# Altium PCB dc_p3_t11_PCB.PcbDoc (part 1 of 2)
Units mm, origin at the board's own origin, x right, y up, seen from the top; angles counter-clockwise.
Board outline 99.95 x 100 mm, 2 copper layers (Top Layer, Bottom Layer), stack 1.56 mm thick; 142 components, 91 nets, 397 pads, 74 vias.
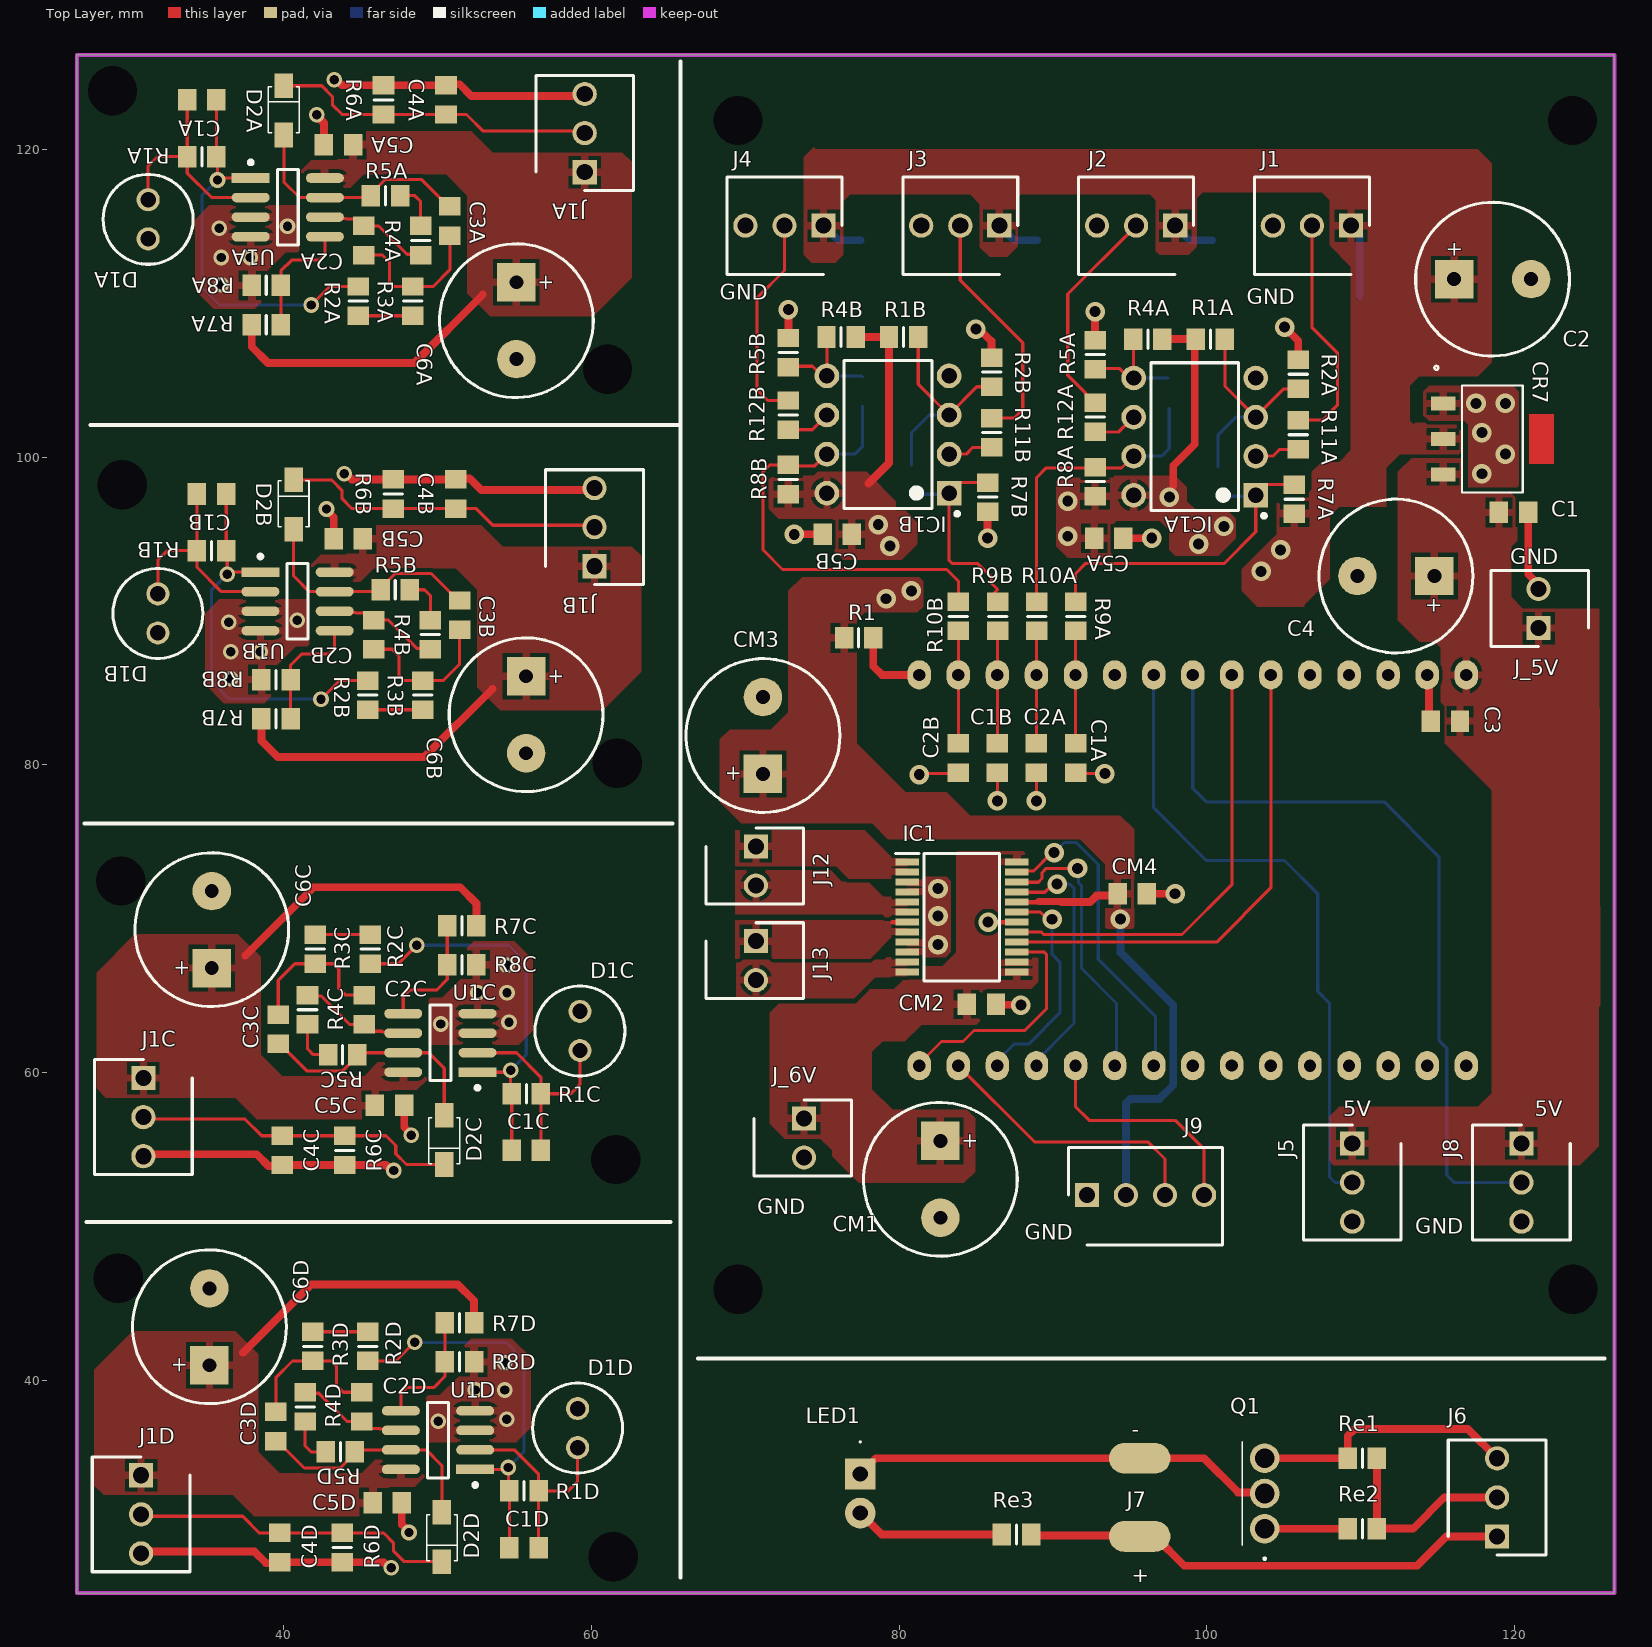
[diagram p0: Top Layer view]
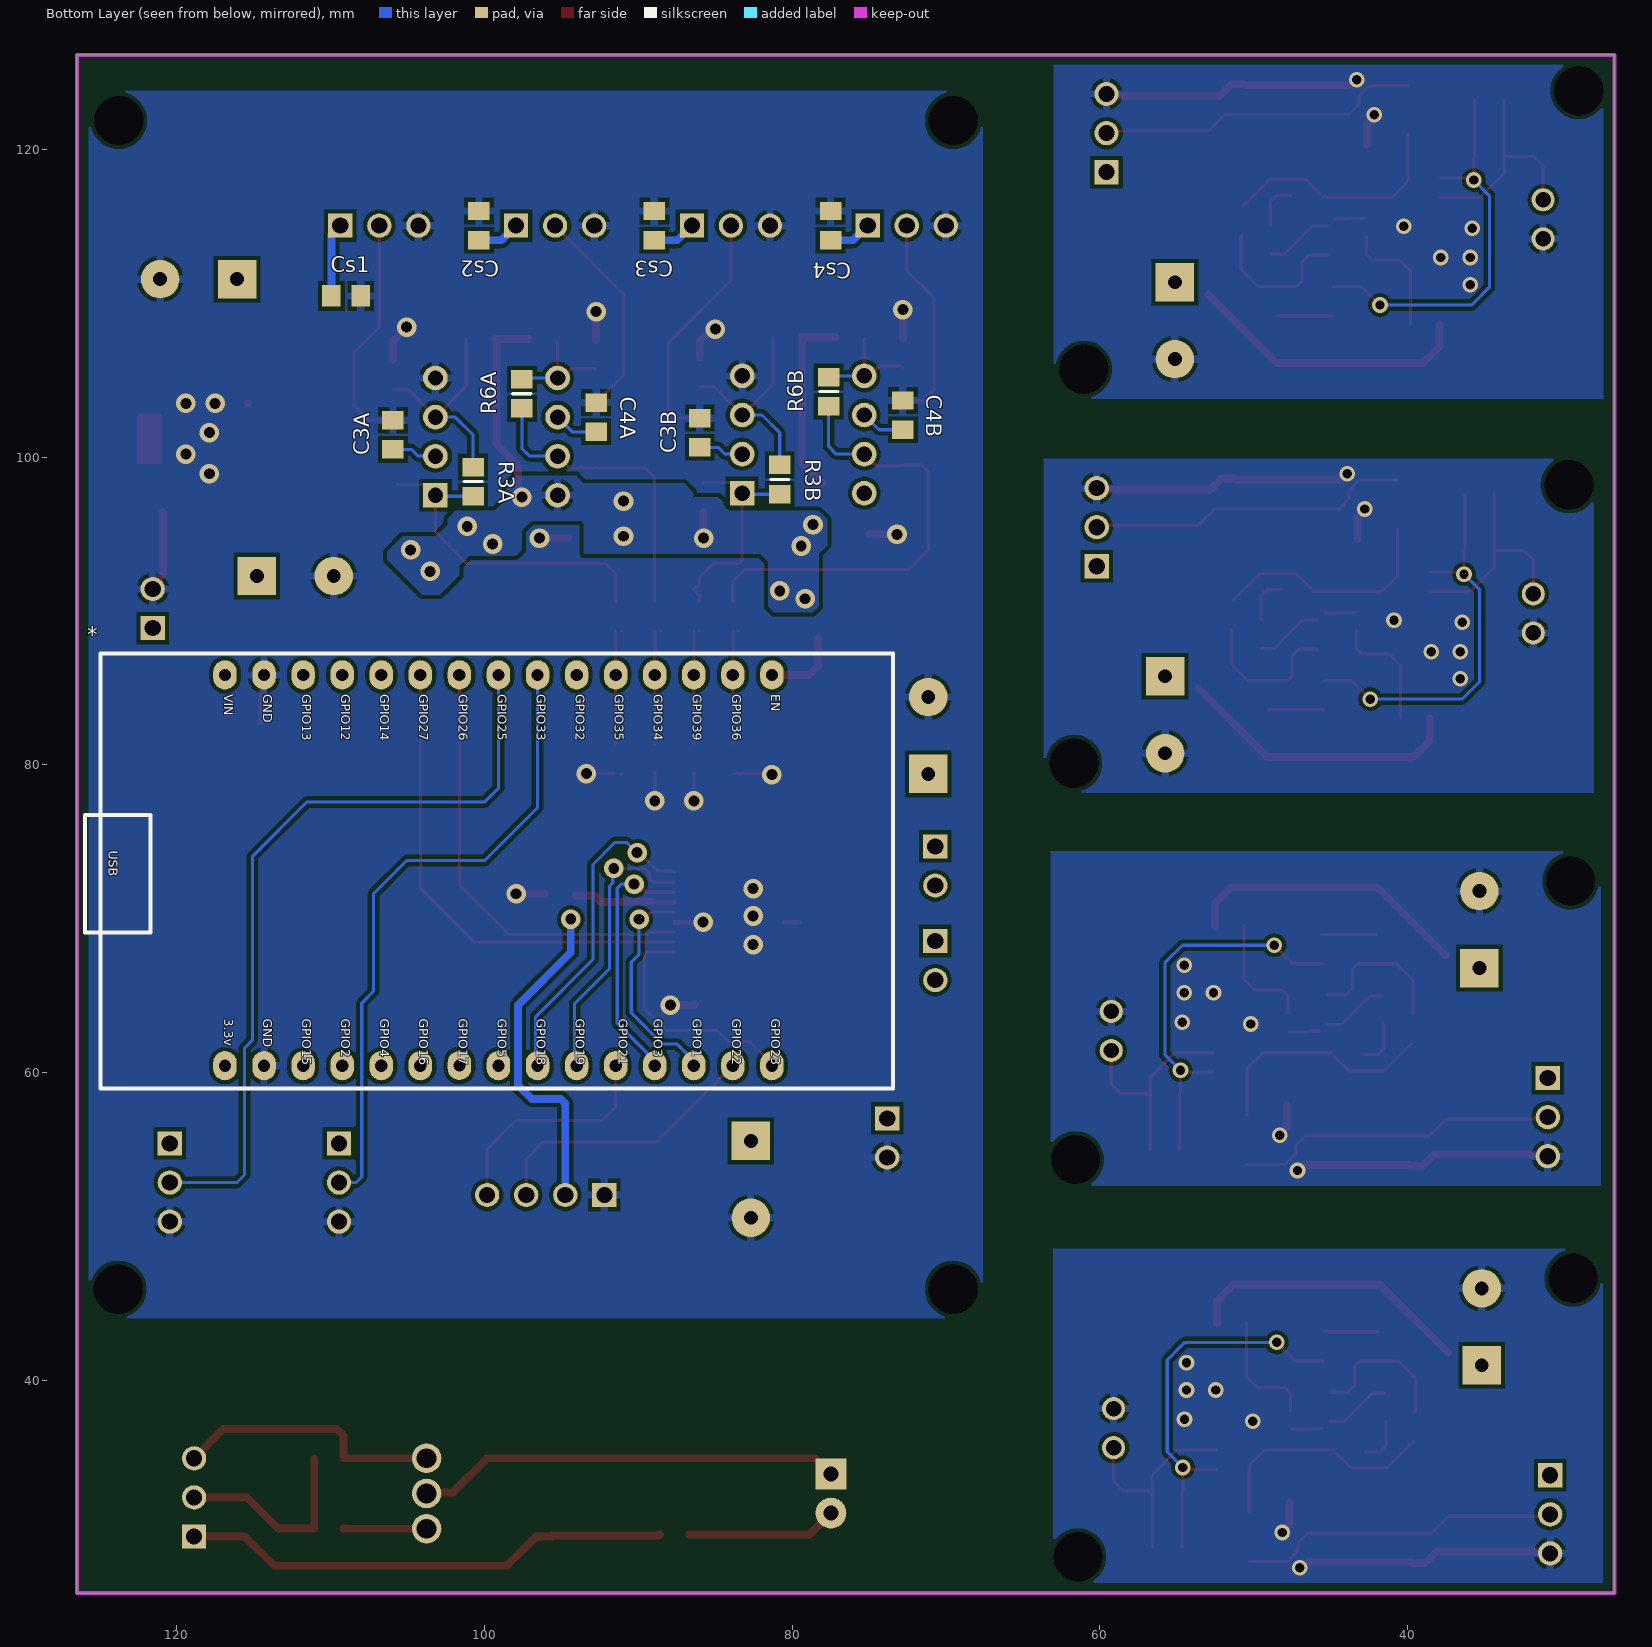
[diagram p1: Bottom Layer view, seen from below]
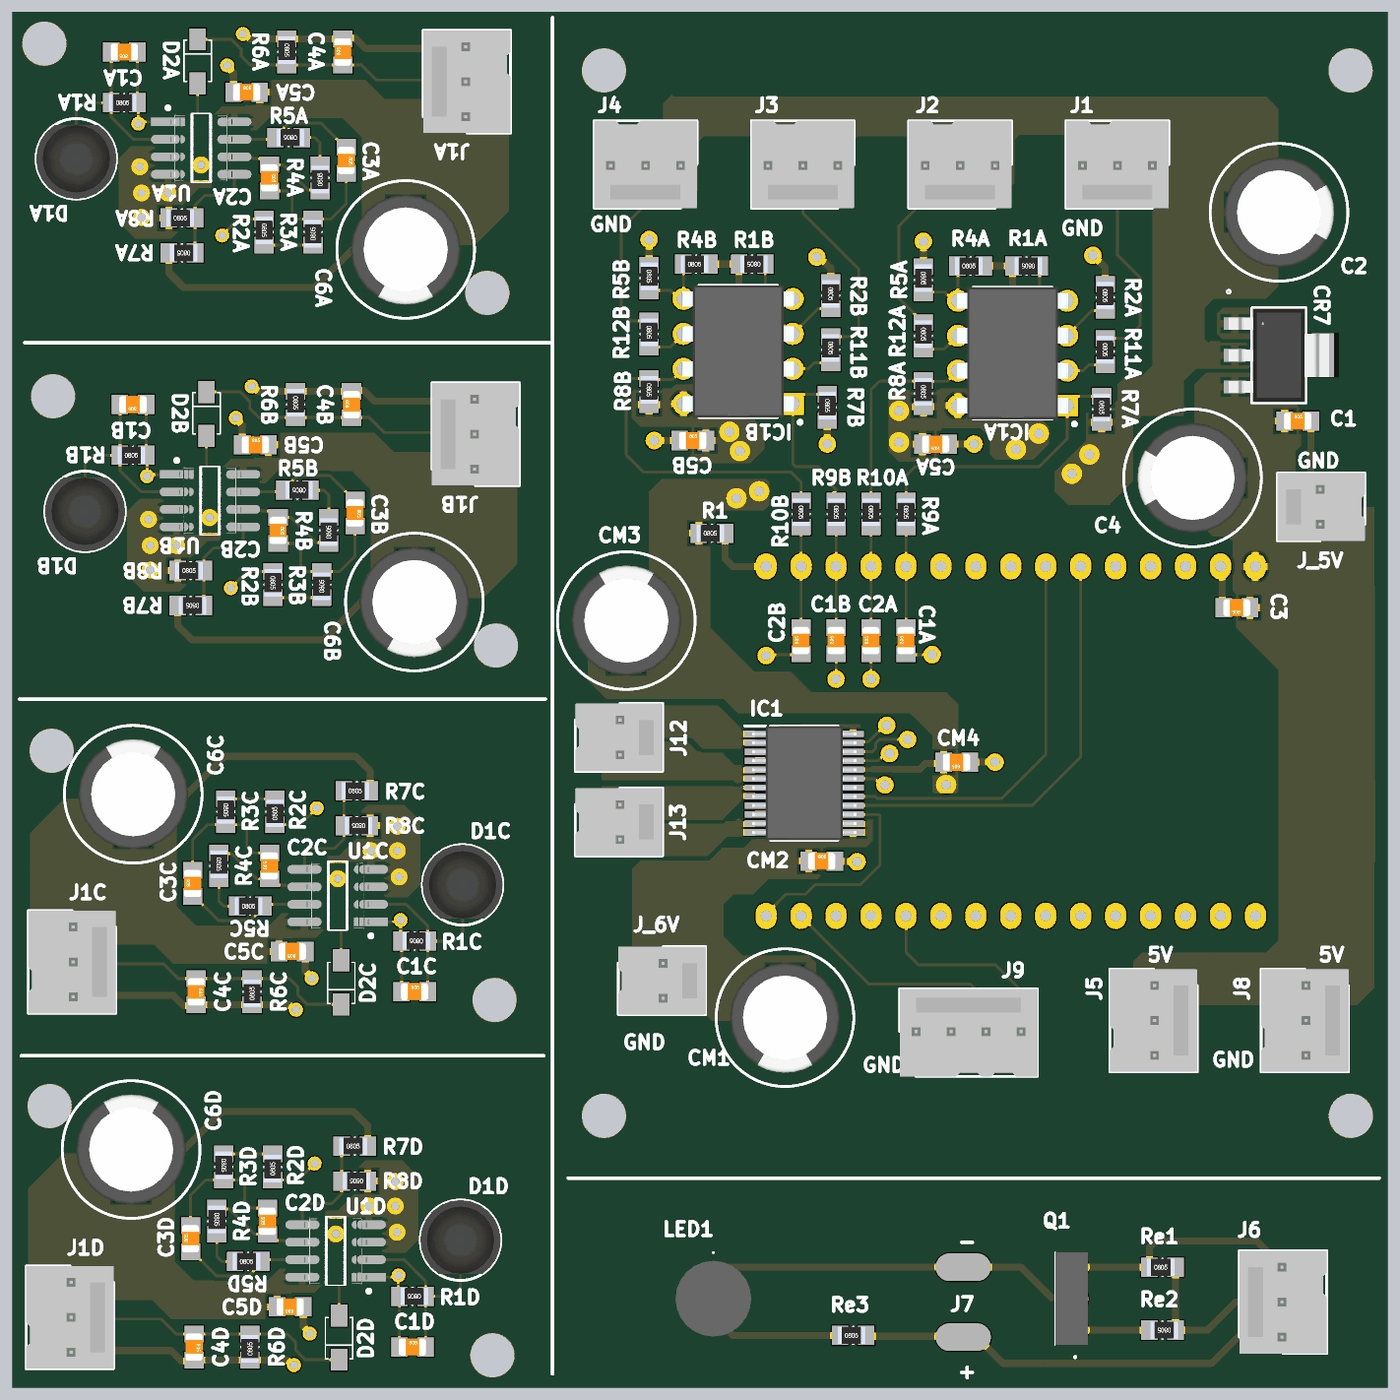
[diagram p3: 3D render of the assembled board from above, using the file's embedded part models]
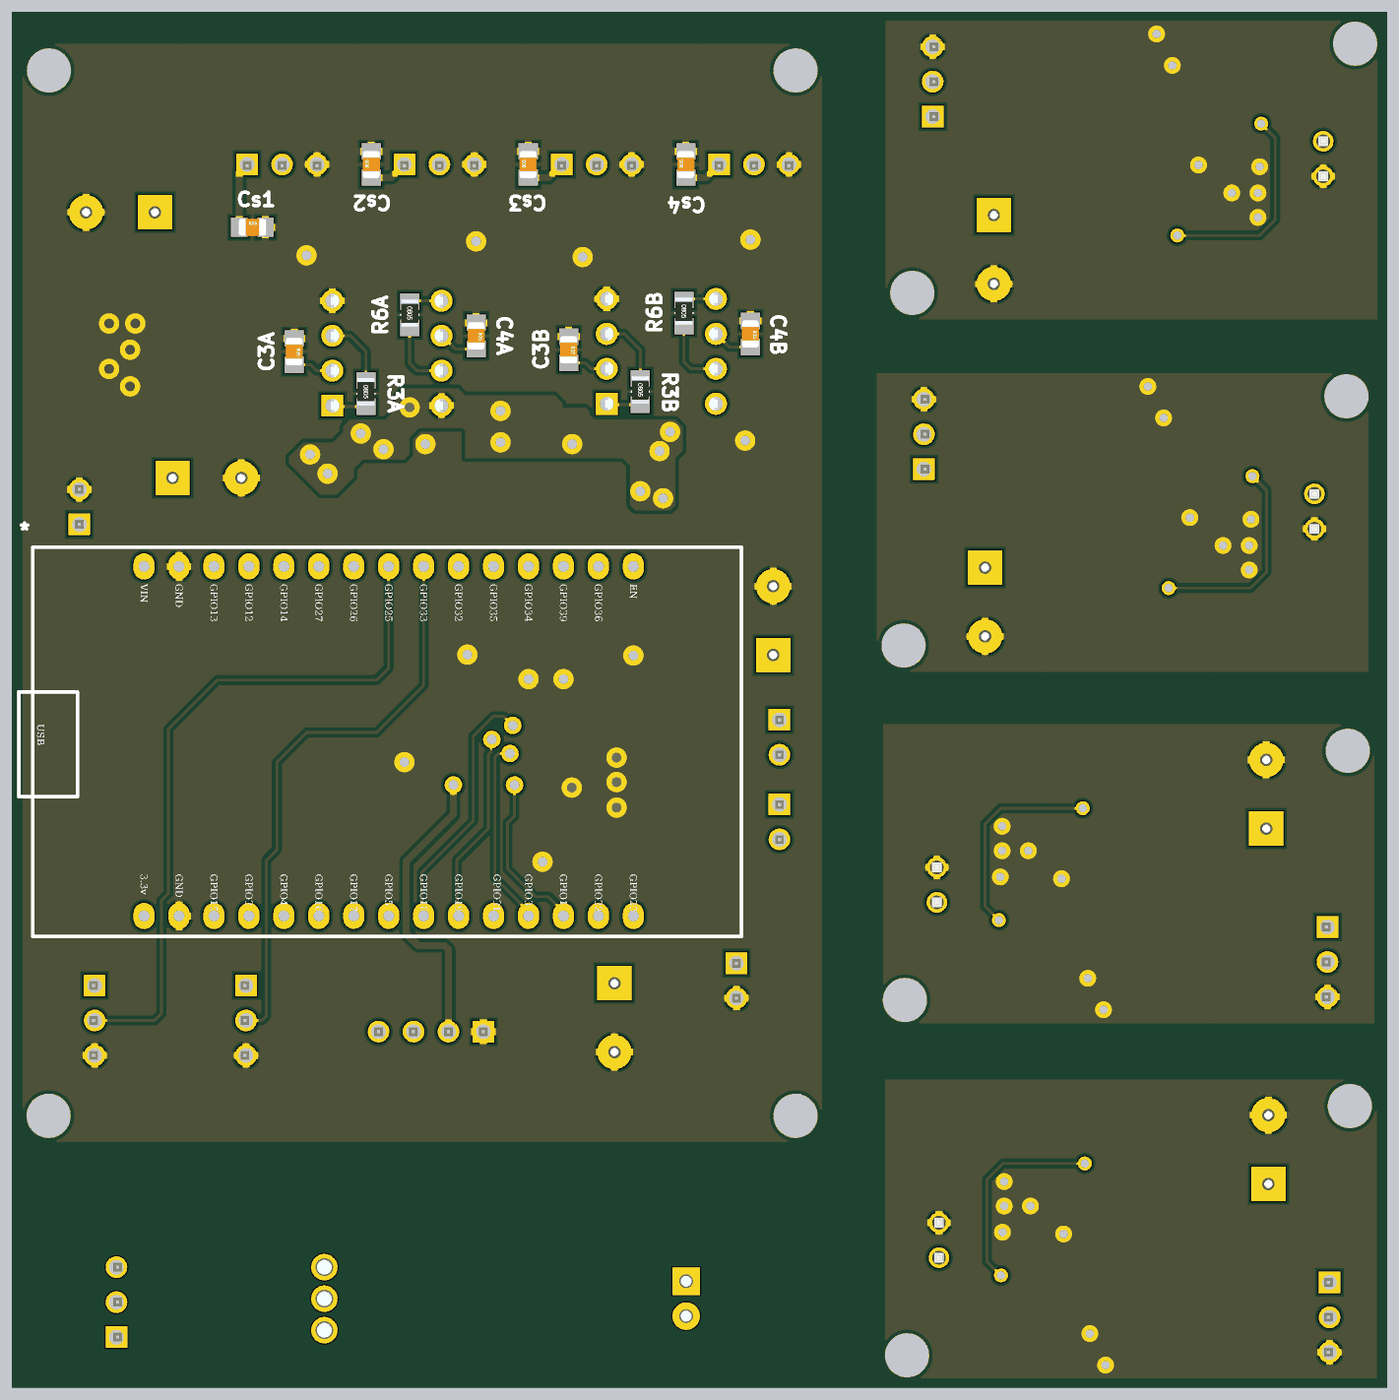
[diagram p4: 3D render of the assembled board from below, using the file's embedded part models]

## Layer stack, top to bottom
Top Solder: solder mask 0.0254, SM-001, Dk 4
Top Layer: signal copper 0.035
Dielectric 1: core 1.4902, Core-039, Dk 4.8
Bottom Layer: signal copper 0.035
Bottom Solder: solder mask 0.0254, SM-001, Dk 4

## Board outline
26.543,26.162 26.543,126.162 126.492,126.162 126.492,26.162

## Design rules (kind name [scope] priority, off if disabled: settings)
BoardOutlineClearance [All] p1: gap=0.3 ignorepadtopadclearanceinfootprint=FALSE except(0.4: Arc-SplitBarrior Arc-SplitContinuation Track-SplitBarrior Track-SplitContinuation SMDPad-SplitBarrior SMDPad-SplitContinuation THPad-SplitBarrior THPad-SplitContinuation Via-SplitBarrior Via-SplitContinuation Fill-SplitBarrior Fill-SplitContinuation Poly-SplitBarrior Poly-SplitContinuation Region-SplitBarrior Region-SplitContinuation Text-SplitBarrior Text-SplitContinuation)
Clearance [All] p1: gap=0.254 ignorepadtopadclearanceinfootprint=TRUE
Height [All] p1: minheight=0 maxheight=50 prefheight=12.7
HoleSize [All] p1: absolutevalues=TRUE maxlimit=12 minlimit=0.25 maxpercent=80.000 minpercent=20.000
MinimumAnnularRing Mounting_holes [HasPad('Free-3_Us4')] p1: minimumring=0
MinimumAnnularRing [All] p2: minimumring=0.13
MinimumSolderMaskSliver [All] p1: minsoldermaskwidth=0.102
PolygonConnect [All] p1: thpad.connectstyle=Relief thpad.reliefconductorwidth=0.508 thpad.reliefentries=4 thpad.polygonreliefangle="90 Angle" thpad.airgapwidth=0.254 smdpad.connectstyle=Relief smdpad.reliefconductorwidth=0.508 smdpad.reliefentries=4 smdpad.polygonreliefangle="90 Angle" smdpad.airgapwidth=0.254 via.connectstyle=Direct via.reliefconductorwidth=0.508 via.reliefentries=4 via.polygonreliefangle="90 Angle" via.airgapwidth=0.254
RoutingVias [InNetClass('Signal')] p1: holewidth=1.016 width=0.61 viastyle="Through Hole" minholewidth=0.25 minwidth=0.4 maxholewidth=1 maxwidth=2
SilkToSilkClearance [All] p1: silktosilkclearance=0.102
SilkToSolderMaskClearance [IsPad] p1: minsilkscreentomaskgap=0.102 clearancetoexposedcopper=TRUE
SolderMaskExpansion [All] p1: expansion=0.102 istentingtop=FALSE
SupplyNets "Schematic Supply Nets_63" [InNet('3V3')] p1: voltage=0.000
SupplyNets "Schematic Supply Nets_62" [InNet('GND')] p2: voltage=0.000
SupplyNets "Schematic Supply Nets_61" [InNet('Vcomp4')] p3: voltage=0.000
SupplyNets "Schematic Supply Nets_60" [InNet('Venv2')] p4: voltage=0.000
SupplyNets "Schematic Supply Nets_59" [InNet('Venv3')] p5: voltage=0.000
SupplyNets "Schematic Supply Nets_58" [InNet('Vcomp1')] p6: voltage=0.000
SupplyNets "Schematic Supply Nets_57" [InNet('Venv4')] p7: voltage=0.000
SupplyNets "Schematic Supply Nets_56" [InNet('Vcomp2')] p8: voltage=0.000
SupplyNets "Schematic Supply Nets_14" [InNet('Vcomp3')] p9: voltage=0.000
SupplyNets "Schematic Supply Nets_13" [InNet('Venv1')] p10: voltage=0.000
SupplyNets "Schematic Supply Nets_85" [InNet('VenvA')] p11: voltage=0.000
SupplyNets "Schematic Supply Nets_82" [InNet('1.65VD')] p12: voltage=0.000
SupplyNets "Schematic Supply Nets_71" [InNet('3V3D')] p13: voltage=0.000
SupplyNets "Schematic Supply Nets_70" [InNet('V2+B')] p14: voltage=0.000
SupplyNets "Schematic Supply Nets_68" [InNet('VmfbA')] p15: voltage=0.000
SupplyNets "Schematic Supply Nets_55" [InNet('GNDA')] p16: voltage=0.000
SupplyNets "Schematic Supply Nets_52" [InNet('1.65VA')] p17: voltage=0.000
SupplyNets "Schematic Supply Nets_50" [InNet('GNDD')] p18: voltage=0.000
SupplyNets "Schematic Supply Nets_48" [InNet('V1+B')] p19: voltage=0.000
SupplyNets "Schematic Supply Nets_46" [InNet('3V3C')] p20: voltage=0.000
SupplyNets "Schematic Supply Nets_45" [InNet('VenvD')] p21: voltage=0.000
SupplyNets "Schematic Supply Nets_44" [InNet('1.65VC')] p22: voltage=0.000
SupplyNets "Schematic Supply Nets_43" [InNet('VmfbD')] p23: voltage=0.000
SupplyNets "Schematic Supply Nets_42" [InNet('1.65VB')] p24: voltage=0.000
SupplyNets "Schematic Supply Nets_41" [InNet('GNDB')] p25: voltage=0.000
SupplyNets "Schematic Supply Nets_39" [InNet('V1+A')] p26: voltage=0.000
SupplyNets "Schematic Supply Nets_38" [InNet('VtiaA')] p27: voltage=0.000
SupplyNets "Schematic Supply Nets_37" [InNet('3V3A')] p28: voltage=0.000
SupplyNets "Schematic Supply Nets_35" [InNet('V2+A')] p29: voltage=0.000
SupplyNets "Schematic Supply Nets_32" [InNet('GNDC')] p30: voltage=0.000
SupplyNets "Schematic Supply Nets_31" [InNet('VtiaD')] p31: voltage=0.000
SupplyNets "Schematic Supply Nets_30" [InNet('VtiaC')] p32: voltage=0.000
SupplyNets "Schematic Supply Nets_27" [InNet('VtiaB')] p33: voltage=0.000
SupplyNets "Schematic Supply Nets_26" [InNet('VmfbB')] p34: voltage=0.000
SupplyNets "Schematic Supply Nets_12" [InNet('VenvB')] p35: voltage=0.000
SupplyNets "Schematic Supply Nets_11" [InNet('3V3B')] p36: voltage=0.000
SupplyNets "Schematic Supply Nets_5" [InNet('VenvC')] p37: voltage=0.000
SupplyNets "Schematic Supply Nets_3" [InNet('VmfbC')] p38: voltage=0.000
SupplyNets "Schematic Supply Nets_47" [InNet('Dspkr')] p39: voltage=0.000
SupplyNets "Schematic Supply Nets_29" [InNet('Dled')] p40: voltage=0.000
SupplyNets "Schematic Supply Nets_22" [InNet('SCL')] p41: voltage=0.000
SupplyNets "Schematic Supply Nets_15" [InNet('Dservo')] p42: voltage=0.000
SupplyNets "Schematic Supply Nets_2" [InNet('SDA')] p43: voltage=0.000
SupplyNets "Schematic Supply Nets_1" [InNet('Dled_e')] p44: voltage=0.000
SupplyNets "Schematic Supply Nets_24" [InNet('MB+')] p45: voltage=0.000
SupplyNets "Schematic Supply Nets_23" [InNet('AIN2')] p46: voltage=0.000
SupplyNets "Schematic Supply Nets_21" [InNet('MA-')] p47: voltage=0.000
SupplyNets "Schematic Supply Nets_20" [InNet('BIN2')] p48: voltage=0.000
SupplyNets "Schematic Supply Nets_19" [InNet('AIN1')] p49: voltage=0.000
SupplyNets "Schematic Supply Nets_18" [InNet('PWMA')] p50: voltage=0.000
SupplyNets "Schematic Supply Nets_17" [InNet('MA+')] p51: voltage=0.000
SupplyNets "Schematic Supply Nets_16" [InNet('STBY')] p52: voltage=0.000
SupplyNets "Schematic Supply Nets_10" [InNet('BIN1')] p53: voltage=0.000
SupplyNets "Schematic Supply Nets_7" [InNet('6V')] p54: voltage=0.000
SupplyNets "Schematic Supply Nets_6" [InNet('MB-')] p55: voltage=0.000
SupplyNets "Schematic Supply Nets_4" [InNet('PWMB')] p56: voltage=0.000
SupplyNets "Schematic Supply Nets_9" [InNet('5V_e')] p57: voltage=0.000
SupplyNets "Schematic Supply Nets_8" [InNet('5V')] p58: voltage=0.000
SupplyNets "Schematic Supply Nets" [InNet('GND_e')] p59: voltage=0.000
Width Width_Motor [InNetClass('Motor_Power')] p1: maxlimit=2 minlimit=0.2 preferedwidth=0.5 minimp=50.000000 maximp=50.000000 favimp=50.000000
Width Width_Signals [InNetClass('Signals')] p2: maxlimit=0.254 minlimit=0.178 preferedwidth=0.203 minimp=50.000000 maximp=50.000000 favimp=50.000000
Width [All] p3: maxlimit=10.16 minlimit=0.127 preferedwidth=0.508
25 further rules are at their usual default settings.

## Classes and differential pairs
net class Signals: 1.65VA 1.65VB 1.65VC 1.65VD AIN1 AIN2 BIN1 BIN2 Dled Dservo Dspkr NetC1A_2 NetC1B_2 NetC1C_2 NetC1D_2 NetC2A_1 NetC2A_2 NetC2B_1 NetC2B_2 NetC2C_1 NetC2C_2 NetC2D_1 NetC2D_2 NetR4A_2 NetR4B_2 NetR4C_2 NetR4D_2 PWMA PWMB SCL SDA STBY Vcomp1 Vcomp2 Vcomp3 Vcomp4 Venv1 VenvA VenvB VenvC VenvD VmfbA VmfbB VmfbC VmfbD Vout1A Vout1B Vout2A Vout2B VtiaA VtiaB VtiaC VtiaD
net class Motor_Power: 6V MA+
channel class sensor: Us1 Us2 Us3 Us4
channel class comparator: Uc1 Uc2
component class Us4: C1D C2D C3D C4D C5D C6D D1D D2D J1D m R1D R2D R3D R4D R5D R6D R7D R8D U1D
component class Us3: C1C C2C C3C C4C C5C C6C D1C D2C J1C R1C R2C R3C R4C R5C R6C R7C R8C U1C
component class Us2: C1B C2B C3B C4B C5B C6B D1B D2B J1B R1B R2B R3B R4B R5B R6B R7B R8B U1B
component class Us1: C1A C2A C3A C4A C5A C6A D1A D2A J1A R1A R2A R3A R4A R5A R6A R7A R8A U1A
component class Uc2: C1B C2B C3B C4B C5B IC1B R1B R2B R3B R4B R5B R6B R7B R8B R9B R10B R11B R12B
component class Uc1: C1A C2A C3A C4A C5A IC1A R1A R2A R3A R4A R5A R6A R7A R8A R9A R10A R11A R12A
component class dc_p3_t11_Sch: * C1 C2 C3 C4 CM1 CM2 CM3 CM4 CR7 Cs1 Cs2 Cs3 Cs4 IC1 J1 J2 J3 J4 J5 J6 J7 J8 J9 J12 J13 J_5V J_6V LED1 Q1 R1 Re1 Re2 Re3

## Components (designator, comment, footprint, x,y, rotation, side; value= is the part's Value field where it differs from the comment)
* "ESP32_30Pin" ESP32_30pin 99.846,73.924 r270 bottom
C1 "CCAP_0805" C0805 119.939,96.418 r0 top value=0.1u
C1A "CCAP_0805" C0805 91.465,80.457 r90 top value=10n (schematic designator C1)
C1A "CCAP_0805" C0805 34.664,123.237 r180 top value=2.2p (schematic designator C1)
C1B "CCAP_0805" C0805 86.385,80.457 r90 top value=10n (schematic designator C1)
C1B "CCAP_0805" C0805 35.299,97.616 r180 top value=2.2p (schematic designator C1)
C1C "CCAP_0805" C0805 55.76,54.944 r0 top value=2.2p (schematic designator C1)
C1D "CCAP_0805" C0805 55.607,29.124 r0 top value=2.2p (schematic designator C1)
C2 "ECAP_CR05P0" EC_CR05 118.578,111.582 r0 top value=10u
C2A "CCAP_0805" C0805 88.925,80.457 r90 top value=10n (schematic designator C2)
C2A "CCAP_0805" C0805 45.205,114.093 r270 top value=1n (schematic designator C2)
C2B "CCAP_0805" C0805 83.845,80.457 r90 top value=10n (schematic designator C2)
C2B "CCAP_0805" C0805 45.84,88.472 r270 top value=1n (schematic designator C2)
C2C "CCAP_0805" C0805 45.219,64.088 r90 top value=1n (schematic designator C2)
C2D "CCAP_0805" C0805 45.066,38.268 r90 top value=1n (schematic designator C2)
C3 "CCAP_0805" C0805 115.508,82.854 r180 top value=0.1u
C3A "CCAP_0805" C0805 105.943,101.465 r270 bottom value=100n (schematic designator C3)
C3A "CCAP_0805" C0805 50.793,115.363 r270 top value=1n (schematic designator C3)
C3B "CCAP_0805" C0805 86.004,101.6 r270 bottom value=100n (schematic designator C3)
C3B "CCAP_0805" C0805 51.428,89.742 r270 top value=1n (schematic designator C3)
C3C "CCAP_0805" C0805 39.631,62.818 r90 top value=1n (schematic designator C3)
C3D "CCAP_0805" C0805 39.478,36.998 r90 top value=1n (schematic designator C3)
C4 "ECAP_CR05P0" EC_CR05 112.293,92.283 r180 top value=10u
C4A "CCAP_0805" C0805 92.735,102.608 r270 bottom value=100n (schematic designator C4)
C4A "CCAP_0805" C0805 50.539,123.237 r90 top value=100n (schematic designator C4)
C4B "CCAP_0805" C0805 72.796,102.743 r270 bottom value=100n (schematic designator C4)
C4B "CCAP_0805" C0805 51.174,97.616 r90 top value=100n (schematic designator C4)
C4C "CCAP_0805" C0805 39.885,54.944 r270 top value=100n (schematic designator C4)
C4D "CCAP_0805" C0805 39.732,29.124 r270 top value=100n (schematic designator C4)
C5A "CCAP_0805" C0805 93.624,94.742 r180 top value=0.1u (schematic designator C5)
C5A "CCAP_0805" C0805 43.554,120.316 r0 top value=0.1u (schematic designator C5)
C5B "CCAP_0805" C0805 44.189,94.695 r0 top value=0.1u (schematic designator C5)
C5B "CCAP_0805" C0805 75.971,94.996 r0 top value=0.1u (schematic designator C5)
C5C "CCAP_0805" C0805 46.87,57.865 r180 top value=0.1u (schematic designator C5)
C5D "CCAP_0805" C0805 46.717,32.045 r180 top value=0.1u (schematic designator C5)
C6A "ECAP_CR05P0" EC_CR05 55.111,108.886 r270 top value=10u (schematic designator C6)
C6B "ECAP_CR05P0" EC_CR05 55.746,83.265 r270 top value=10u (schematic designator C6)
C6C "ECAP_CR05P0" EC_CR05 35.313,69.295 r90 top value=10u (schematic designator C6)
C6D "ECAP_CR05P0" EC_CR05 35.16,43.475 r90 top value=10u (schematic designator C6)
CM1 "ECAP_CR05P0" EC_CR05 82.677,53.061 r270 top value=10u
CM2 "CCAP_0805" C0805 85.344,64.44 r0 top value=0.1u
CM3 "ECAP_CR05P0" EC_CR05 71.145,81.915 r90 top value=10u
CM4 "CCAP_0805" C0805 95.148,71.628 r180 top value=0.1u
CR7 "LD1117S33CTR" SOT-223_STM 118.567,101.194 r270 top
Cs1 "CCAP_0805" C0805 108.991,110.49 r180 bottom value=0.1u
Cs2 "CCAP_0805" C0805 100.355,115.062 r90 bottom value=0.1u
Cs3 "CCAP_0805" C0805 88.951,115.062 r90 bottom value=0.1u
Cs4 "CCAP_0805" C0805 77.495,115.062 r90 bottom value=0.1u
D1A "SFH_203_FA" SFH203FA 31.176,116.743 r270 top (schematic designator D1)
D1B "SFH_203_FA" SFH203FA 31.811,91.123 r270 top (schematic designator D1)
D1C "SFH_203_FA" SFH203FA 59.248,61.438 r90 top (schematic designator D1)
D1D "SFH_203_FA" SFH203FA 59.096,35.618 r90 top (schematic designator D1)
D2A "1N4148W-7-F" SOD123 39.998,122.602 r90 top value=2pF (schematic designator D2)
D2B "1N4148W-7-F" SOD123 40.633,96.981 r90 top value=2pF (schematic designator D2)
D2C "1N4148W-7-F" SOD123 50.426,55.579 r270 top value=2pF (schematic designator D2)
D2D "1N4148W-7-F" SOD123 50.273,29.759 r270 top value=2pF (schematic designator D2)
IC1 "TB6612FNG" SOP65P760X160-24N 84.074,70.104 r0 top
IC1A "LM393NG" DIP794W56P254L959H533Q8B 99.212,101.346 r180 top (schematic designator IC1)
IC1B "LM393NG" DIP794W56P254L959H533Q8B 79.273,101.481 r180 top (schematic designator IC1)
J1 "0022232031" HDRV3W87P0X254_1X3_747X635X1105P 109.372,115.062 r180 top
J1A "0022232031" HDRV3W87P0X254_1X3_747X635X1105P 59.556,118.538 r90 top (schematic designator J1)
J1B "0022232031" HDRV3W87P0X254_1X3_747X635X1105P 60.191,92.917 r90 top (schematic designator J1)
J1C "0022232031" HDRV3W87P0X254_1X3_747X635X1105P 30.868,59.643 r270 top (schematic designator J1)
J1D "0022232031" HDRV3W87P0X254_1X3_747X635X1105P 30.715,33.823 r270 top (schematic designator J1)
J2 "0022232031" HDRV3W87P0X254_1X3_747X635X1105P 97.942,115.062 r180 top
J3 "0022232031" HDRV3W87P0X254_1X3_747X635X1105P 86.512,115.062 r180 top
J4 "0022232031" HDRV3W87P0X254_1X3_747X635X1105P 75.082,115.062 r180 top
J5 "0022232031" HDRV3W87P0X254_1X3_747X635X1105P 109.454,55.393 r270 top
J6 "0022232031" HDRV3W87P0X254_1X3_747X635X1105P 118.872,29.845 r90 top
J7 "solder_pad" SOLDER_pad 95.631,29.845 r90 top
J8 "0022232031" HDRV3W87P0X254_1X3_747X635X1105P 120.452,55.393 r270 top
J9 "0022232041" SHDR4W87P0X254_1X4_1001X635X1105P 92.202,52.045 r0 top
J12 "0022232021" SHDR2W87P0X254_1X2_493X635X1105P 70.688,74.701 r270 top
J13 "0022232021" SHDR2W87P0X254_1X2_493X635X1105P 70.688,68.555 r270 top
J_5V "0022232021" SHDR2W87P0X254_1X2_493X635X1105P 121.564,88.9 r90 top
J_6V "0022232021" SHDR2W87P0X254_1X2_493X635X1105P 73.812,57.023 r270 top
LED1 "SFH4556" SFH4556 77.47,33.909 r270 top
Q1 "IRLU024NPBF" IRLU024NPBF 103.759,30.349 r90 top
R1 "RES_0805" R0805 77.368,88.265 r0 top value=10k
R1A "RES_0805" R0805 100.228,107.688 r180 top value=15k (schematic designator R1)
R1A "RES_0805" R0805 34.664,119.554 r0 top value=470k (schematic designator R1)
R1B "RES_0805" R0805 35.299,93.933 r0 top value=470k (schematic designator R1)
R1B "RES_0805" R0805 80.289,107.823 r180 top value=15k (schematic designator R1)
R1C "RES_0805" R0805 55.76,58.627 r180 top value=470k (schematic designator R1)
R1D "RES_0805" R0805 55.607,32.807 r180 top value=470k (schematic designator R1)
R2A "RES_0805" R0805 105.943,105.402 r270 top value=10k (schematic designator R2)
R2A "RES_0805" R0805 44.824,110.156 r270 top value=2.7k (schematic designator R2)
R2B "RES_0805" R0805 45.459,84.535 r270 top value=2.7k (schematic designator R2)
R2B "RES_0805" R0805 86.004,105.537 r270 top value=10k (schematic designator R2)
R2C "RES_0805" R0805 45.6,68.025 r90 top value=2.7k (schematic designator R2)
R2D "RES_0805" R0805 45.447,42.205 r90 top value=2.7k (schematic designator R2)
R3A "RES_0805" R0805 100.736,98.417 r270 bottom value=470k (schematic designator R3)
R3A "RES_0805" R0805 48.38,110.156 r90 top value=1.5k (schematic designator R3)
R3B "RES_0805" R0805 49.015,84.535 r90 top value=1.5k (schematic designator R3)
R3B "RES_0805" R0805 80.797,98.552 r270 bottom value=470k (schematic designator R3)
R3C "RES_0805" R0805 42.044,68.025 r270 top value=1.5k (schematic designator R3)
R3D "RES_0805" R0805 41.891,42.205 r270 top value=1.5k (schematic designator R3)
R4A "RES_0805" R0805 96.164,107.688 r0 top value=15k (schematic designator R4)
R4A "RES_0805" R0805 48.888,114.093 r90 top value=27k (schematic designator R4)
R4B "RES_0805" R0805 76.225,107.823 r0 top value=15k (schematic designator R4)
R4B "RES_0805" R0805 49.523,88.472 r90 top value=27k (schematic designator R4)
R4C "RES_0805" R0805 41.536,64.088 r270 top value=27k (schematic designator R4)
R4D "RES_0805" R0805 41.383,38.268 r270 top value=27k (schematic designator R4)
R5A "RES_0805" R0805 92.735,106.672 r270 top value=10k (schematic designator R5)
R5A "RES_0805" R0805 46.602,117.014 r180 top value=15k (schematic designator R5)
R5B "RES_0805" R0805 72.796,106.807 r270 top value=10k (schematic designator R5)
R5B "RES_0805" R0805 47.237,91.393 r180 top value=15k (schematic designator R5)
R5C "RES_0805" R0805 43.822,61.167 r0 top value=15k (schematic designator R5)
R5D "RES_0805" R0805 43.669,35.347 r0 top value=15k (schematic designator R5)
R6A "RES_0805" R0805 97.561,104.132 r270 bottom value=470k (schematic designator R6)
R6A "RES_0805" R0805 46.475,123.237 r270 top value=10k (schematic designator R6)
R6B "RES_0805" R0805 47.11,97.616 r270 top value=10k (schematic designator R6)
R6B "RES_0805" R0805 77.622,104.267 r270 bottom value=470k (schematic designator R6)
R6C "RES_0805" R0805 43.949,54.944 r90 top value=10k (schematic designator R6)
R6D "RES_0805" R0805 43.796,29.124 r90 top value=10k (schematic designator R6)
R7A "RES_0805" R0805 105.689,97.274 r270 top value=10k (schematic designator R7)
R7A "RES_0805" R0805 38.855,108.632 r180 top value=15k (schematic designator R7)
R7B "RES_0805" R0805 85.75,97.409 r270 top value=10k (schematic designator R7)
R7B "RES_0805" R0805 39.49,83.011 r180 top value=15k (schematic designator R7)
R7C "RES_0805" R0805 51.569,69.549 r0 top value=15k (schematic designator R7)
R7D "RES_0805" R0805 51.416,43.729 r0 top value=15k (schematic designator R7)
R8A "RES_0805" R0805 92.735,98.417 r270 top value=10k (schematic designator R8)
R8A "RES_0805" R0805 38.855,111.172 r0 top value=15k (schematic designator R8)
R8B "RES_0805" R0805 72.796,98.552 r270 top value=10k (schematic designator R8)
R8B "RES_0805" R0805 39.49,85.551 r0 top value=15k (schematic designator R8)
R8C "RES_0805" R0805 51.569,67.009 r180 top value=15k (schematic designator R8)
R8D "RES_0805" R0805 51.416,41.189 r180 top value=15k (schematic designator R8)
R9A "RES_0805" R0805 91.473,89.662 r270 top value=100 (schematic designator R9)
R9B "RES_0805" R0805 86.393,89.662 r270 top value=100 (schematic designator R9)
R10A "RES_0805" R0805 88.933,89.662 r270 top value=100 (schematic designator R10)
R10B "RES_0805" R0805 83.853,89.662 r270 top value=100 (schematic designator R10)
R11A "RES_0805" R0805 105.943,101.465 r270 top value=1k (schematic designator R11)
R11B "RES_0805" R0805 86.004,101.6 r270 top value=1k (schematic designator R11)
R12A "RES_0805" R0805 92.735,102.608 r270 top value=1k (schematic designator R12)
R12B "RES_0805" R0805 72.796,102.743 r270 top value=1k (schematic designator R12)
Re1 "RES_0805" R0805 110.109,34.925 r0 top value=10k
Re2 "RES_0805" R0805 110.109,30.353 r180 top value=220
Re3 "RES_0805" R0805 87.63,29.972 r0 top value=32
U1A "TLV9162IDR" SOIC8-Ti-Footprint 40.252,116.252 r0 top (schematic designator U1)
U1B "TLV9162IDR" SOIC8-Ti-Footprint 40.887,90.631 r0 top (schematic designator U1)
U1C "TLV9162IDR" SOIC8-Ti-Footprint 50.172,61.929 r180 top (schematic designator U1)
U1D "TLV9162IDR" SOIC8-Ti-Footprint 50.019,36.109 r180 top (schematic designator U1)

## Footprints (in the part's own frame and the unit in brackets; to place one, negate y for a bottom-side part, rotate by r counter-clockwise, add the part's x,y. Pads: shape width x height; smd on the part's side, far side on the other; paste and mask are expansions set on the pad)
C0805 [mm]
  rect 1.2x1.4 smd: 1(-0.95,0) 2(0.95,0)
  body extent -1,-0.63 1,0.63, height 0.78
DIP794W56P254L959H533Q8B [mm]
  rect 1.6x1.6 hole 1: 1(-3.97,3.81)
  round 1.6 hole 1: 2(-3.97,1.27) 3(-3.97,-1.27) 4(-3.97,-3.81) 5(3.97,-3.81) 6(3.97,-1.27) 7(3.97,1.27) 8(3.97,3.81)
  silkscreen extent -4.63,-4.8 2.85,5.27, body extent -4.11,-4.79 4.11,4.79, height 5.33
EC_CR05 [mm]
  rect 2.5x2.5 hole 0.9: 1(-2.5,0)
  round 2.5 hole 0.9: 2(2.5,0)
  silkscreen extent -5,-5 5,5, body extent -4,-3.99 4,3.99, height 11.5
ESP32_30pin [mm]
  rrect100% 1.9x1.524 hole 0.8: 1(-11.928,-17.02) 2(-11.928,-14.48) 3(-11.928,-11.94) 4(-11.928,-9.4) 5(-11.928,-6.86) 6(-11.928,-4.32) 7(-11.928,-1.78) 8(-11.928,0.76) 9(-11.928,3.3) 10(-11.928,5.84) 11(-11.928,8.38) 12(-11.928,10.92) 13(-11.928,13.46) 14(-11.928,16) 15(-11.928,18.54) 16(13.472,-17.02) 17(13.472,-14.48) 18(13.472,-11.94) 19(13.472,-9.4) 20(13.472,-6.86) 21(13.472,-4.32) 22(13.462,-1.778) 23(13.472,0.76) 24(13.472,3.3) 25(13.472,5.84) 26(13.472,8.38) 27(13.472,10.92) 28(13.472,13.46) 29(13.472,16) 30(13.472,18.54)
  silkscreen extent -13.33,-26.11 14.97,26.4
HDRV3W87P0X254_1X3_747X635X1105P [mm]
  rect 1.575x1.575 hole 1.05: 1(0,0)
  round 1.575 hole 1.05: 2(2.54,0) 3(5.08,0)
  silkscreen extent -1.19,-3.17 6.27,3.18, body extent -1.19,-3.17 6.27,3.18, height 10.66
IRLU024NPBF [mm]
  round 1.92 hole 1.28: 1(0,0) 2(2.29,0) 3(4.58,0)
  silkscreen extent -2,-0.05 5.66,1.45, body extent -1.07,-0.94 5.66,1.45, height 7.89
R0805 [mm]
  rect 1.2x1.4 smd: 1(-0.95,0) 2(0.95,0)
  silkscreen extent 0,-0.6 0,0.6, body extent -1.13,-0.63 0.87,0.63, height 0.45
SFH203FA [mm]
  round 1.5 hole 1: 1(0,0) 2(2.54,0)
  silkscreen extent -1.65,-2.93 4.19,2.93, body extent -1.18,-2.91 4.18,2.91, height 12.5
SFH4556 [mm]
  rect 2x2 hole 1: 1(0,0)
  round 2 hole 1: 2(2.54,0)
  silkscreen extent -2.13,-0.05 -2.03,0.05, body extent -1.47,-2.75 4.01,2.75, height 8.2
SHDR2W87P0X254_1X2_493X635X1105P [mm]
  rect 1.575x1.575 hole 1.05: 1(0,0)
  round 1.575 hole 1.05: 2(2.54,0)
  silkscreen extent -1.19,-3.25 3.74,3.1, body extent -1.18,-3.25 3.74,3.1, height 10.66
SHDR4W87P0X254_1X4_1001X635X1105P [mm]
  rect 1.575x1.575 hole 1.05: 1(0,0)
  round 1.575 hole 1.05: 2(2.54,0) 3(5.08,0) 4(7.62,0)
  silkscreen extent -1.19,-3.25 8.82,3.1, body extent -1.18,-3.25 8.82,3.1, height 10.66
SOD123 [mm] "SOD123, 2-Leads, Body 2.7x1.55mm, Height 1.45mm"
  rect 1.6x1.2 smd: 1(1.55,0) 2(-1.65,0)
  silkscreen extent -1.5,-1 1.5,1, body extent -1.8,-0.86 1.8,0.86, height 1.21
SOIC8-Ti-Footprint [mm]
  rect 2.469x0.622 smd paste+0 mask+0: 1(-2.414,1.905)
  rrect100% 2.469x0.622 smd paste+0 mask+0: 2(-2.414,0.635) 3(-2.414,-0.635) 4(-2.414,-1.905) 5(2.414,-1.905) 6(2.414,-0.635) 7(2.414,0.635) 8(2.414,1.905)
  silkscreen extent -2.54,-2.45 0.68,3.05, body extent -4.15,-2.95 4.15,2.95, height 0.25
SOLDER_pad [mm]
  rrect100% 2x4 smd: 1(0,0) 2(5.08,0)
SOP65P760X160-24N [mm]
  rect 1.525x0.45 smd: 1(-3.562,3.575) 2(-3.562,2.925) 3(-3.562,2.275) 4(-3.562,1.625) 5(-3.562,0.975) 6(-3.562,0.325) 7(-3.562,-0.325) 8(-3.562,-0.975) 9(-3.562,-1.625) 10(-3.562,-2.275) 11(-3.562,-2.925) 12(-3.562,-3.575) 13(3.562,-3.575) 14(3.562,-2.925) 15(3.562,-2.275) 16(3.562,-1.625) 17(3.562,-0.975) 18(3.562,-0.325) 19(3.562,0.325) 20(3.562,0.975) 21(3.562,1.625) 22(3.562,2.275) 23(3.562,2.925) 24(3.562,3.575)
  silkscreen extent -4.33,-4.15 2.45,4.15, body extent -3.8,-4.15 3.8,4.15, height 1.6
SOT-223_STM [mil]
  rect 36x63 smd paste+0 mask+0: 1(-90.55,-126) 2(0,-126) 3(90.55,-126)
  Top Layer region: 63,94.5 63,157.5 -63,157.5 -63,94.5
  silkscreen extent -187,-148 137,78, body extent -132,-144 132,144, height 71

## Part data
C1 C1A C1A C1B C1B C1C C1D C2A C2A C2B C2B C2C C2D C3 C3A C3A C3B C3B C3C C3D C4A C4A C4B C4B C4C C4D C5A C5A C5B C5B C5C C5D CM2 CM4 Cs1 Cs2 Cs3 Cs4: library part CMP-00003-4, "Generic 0805 cramic capacitor"
C2 C4 C6A C6B C6C C6D CM1 CM3: library part CMP-001-00002-5, "Generic 5mm pitch TH radial electrolytic capacitor"
CR7: "Adjustable and fixed low drop positive voltage regulator", Manufacturer_Name=STMicroelectronics, Copyright="Copyright (C) 2026 Ultra Librarian. All rights reserved.", Manufacturer_Part_Number=LD1117S33CTR, RefDes=RefDes, Type=Type
D1A D1B D1C D1D: "LED", Manufacturer_Name="ams OSRAM", Manufacturer_Part_Number="SFH 203 FA", Mouser Part Number=720-SFH203FA, Datasheet Link=https://datasheet.datasheetarchive.com/originals/distributors/DKDS41/DSANUWW0036828.pdf, Height=8.9mm, Mouser Price/Stock=https://www.mouser.co.uk/ProductDetail/ams-OSRAM/SFH-203-FA?qs=K5ta8V%252BWhtaq1pinUuBcnA%3D%3D
D2A D2B D2C D2D: library part CMP-004-00000-2, "Small Signal Diode, Single, 100 V, 300 mA, 4ns, SOD-123", Current Rating=150mA, Forward Voltage=715mV
IC1: "Integrated Circuit", Manufacturer_Name=Toshiba, Mouser Part Number=N/A, Datasheet Link=https://datasheet.datasheetarchive.com/originals/distributors/SFDatasheet-6/sf-000138015.pdf, Height=1.6mm, Manufacturer_Part_Number=TB6612FNG, Mouser Price/Stock=https://www.mouser.co.uk/ProductDetail/Toshiba/TB6612FNG?qs=By6Nw2ByBD2hYPrK9yTkWQ%3D%3D
IC1A IC1B: "Integrated Circuit", Manufacturer_Name=onsemi, Mouser Part Number=863-LM393NG, Arrow Part Number=LM393NG, Arrow Price/Stock=https://www.arrow.com/en/products/lm393ng/on-semiconductor, Datasheet Link=https://www.onsemi.com/download/data-sheet/pdf/LM393-D.PDF, Height=5.33mm, Manufacturer_Part_Number=LM393NG, Mouser Price/Stock=https://www.mouser.co.uk/ProductDetail/onsemi/LM393NG?qs=2OtswVQKCOHsX%252BSjFJpNuQ%3D%3D
J1 J1A J1B J1C J1D J2 J3 J4 J5 J6 J8 J9 J12 J13 J_5V J_6V: "Connector", Manufacturer_Name=Molex, Mouser Part Number=N/A, Height=11.05mm
  J1 J1A J1B J1C J1D J2 J3 J4 J5 J6 J8: Arrow Part Number=0022232031, Arrow Price/Stock=https://www.arrow.com/en/products/0022232031/molex?utm_currency=USD&region=europe, Datasheet Link=https://www.molex.com/en-us/products/part-detail-pdf/22232031?display=pdf, Manufacturer_Part_Number=0022232031, Mouser Price/Stock=https://www.mouser.co.uk/ProductDetail/Molex/0022232031?qs=PBcRNPEHKsqLjUBIVcYwpw%3D%3D
  J9: Arrow Part Number=0022232041, Arrow Price/Stock=https://www.arrow.com/en/products/0022232041/molex?region=europe, Datasheet Link=https://www.molex.com/en-us/products/part-detail-pdf/22232041?display=pdf, Manufacturer_Part_Number=0022232041, Mouser Price/Stock=https://www.mouser.co.uk/ProductDetail/Molex/0022232041?qs=PBcRNPEHKsqk0H%252BHi3IwIw%3D%3D
  J12 J13 J_5V J_6V: Arrow Part Number=0022232021, Arrow Price/Stock=https://www.arrow.com/en/products/0022232021/molex?utm_currency=USD&region=europe, Datasheet Link=https://www.molex.com/en-us/products/part-detail-pdf/22232021?display=pdf, Manufacturer_Part_Number=0022232021, Mouser Price/Stock=https://www.mouser.co.uk/ProductDetail/Molex/0022232021?qs=PBcRNPEHKspVhuxYRaP9bQ%3D%3D
LED1: "LED", Manufacturer_Name="ams OSRAM", Datasheet Link=https://look.ams-osram.com/m/23a378ed43eb7384/original/SFH-4556.pdf, Height=8.1mm, Manufacturer_Part_Number=SFH4556
Q1: "MOSFET (N-Channel)", Manufacturer_Name=Infineon, Mouser Part Number=942-IRLU024NPBF, Arrow Part Number=IRLU024NPBF, Arrow Price/Stock=https://www.arrow.com/en/products/irlu024npbf/infineon-technologies-ag?utm_currency=USD&region=europe, Datasheet Link=https://www.infineon.com/dgdl/irlr024npbf.pdf?fileId=5546d462533600a4015356694f7f265d, Height=7.79mm, Manufacturer_Part_Number=IRLU024NPBF, Mouser Price/Stock=https://www.mouser.co.uk/ProductDetail/Infineon-Technologies/IRLU024NPBF?qs=9%252BKlkBgLFf2Ncy7i4oQSvA%3D%3D
R1 R1A R1A R1B R1B R1C R1D R2A R2A R2B R2B R2C R2D R3A R3A R3B R3B R3C R3D R4A R4A R4B R4B R4C R4D R5A R5A R5B R5B R5C R5D R6A R6A R6B R6B R6C R6D R7A R7A R7B R7B R7C R7D R8A R8A R8B R8B R8C R8D R9A R9B R10A R10B R11A R11B R12A R12B Re1 Re2 Re3: library part CMP-00002-12, "Generic 0805 resistor", Package=0805, Voltage Rating=150V
U1A U1B U1C U1D: library part CMP-001-0004-1, "Dual 10pA 33V/us 11MHz SOIC-8 Operational Amplifier ROHS", Case/Package=SOIC
*: Reference=U

## Free pads (board coordinates)
  round 1.524 hole 3.2: 3_Us4(28.855,123.837) 3_Us4(29.235,46.634) 3_Us4(29.387,72.454) 3_Us4(29.49,98.217) 3_Us4(61.037,105.727) 3_Us4(61.417,28.524) 3_Us4(61.569,54.344) 3_Us4(61.672,80.106) 3_Us4(69.52,45.923) 3_Us4(69.52,121.895) 3_Us4(123.774,121.895) 3_Us4(123.8,45.923)

## Via types
v1: diameter 1.27, hole 0.711, Top Layer to Bottom Layer, 38 vias
v2: diameter 1.016, hole 0.61, Top Layer to Bottom Layer, 36 vias

## Nets (pads, with @x,y where several pads share a name; then routed paths per layer and width w, separated by ;. In a path a pad name is that pad's centre, name@x,y a point inside that pad or via, vN(x,y) a via of type N, cw(c..) or ccw(c..) an arc to the next point about the centre after c; other vN are vias at no path point)
1.65VA: R7A.1@39.805,108.632 R8A.2@39.805,111.172 U1A.5 | length 7.9
  Top Layer w0.203: R7A.1@39.805,108.632 R8A.2@39.805,111.172 39.805,112.122 40.506,112.823 42.284,112.823 42.666,113.204 U1A.5@42.666,114.347
1.65VB: R7B.1@40.44,83.011 R8B.2@40.44,85.551 U1B.5 | length 7.9
  Top Layer w0.203: R7B.1@40.44,83.011 R8B.2@40.44,85.551 40.44,86.501 41.141,87.202 42.919,87.202 43.301,87.584 U1B.5@43.301,88.726
1.65VC: R7C.1 R8C.2 U1C.5 | length 7.9
  Top Layer w0.203: U1C.5@47.758,63.834 47.758,64.977 48.14,65.358 49.918,65.358 50.619,66.059 R8C.2@50.619,67.009 R7C.1@50.619,69.549
1.65VD: R7D.1 R8D.2 U1D.5 | length 7.9
  Top Layer w0.203: U1D.5@47.606,38.014 47.606,39.157 47.987,39.538 49.765,39.538 50.466,40.239 R8D.2@50.466,41.189 R7D.1@50.466,43.729
3V3: C2.1 C5A.2@92.674,94.742 C5B.2@76.921,94.996 CM3.1 CM4.2 CR7.2 Cs1.1 Cs2.1 Cs3.1 Cs4.1 IC1.20 IC1A.8 IC1B.8 J1.1 J2.1 J3.1 J4.1 J9.2 R1.1 R1A.2@99.278,107.688 R1B.2@79.339,107.823 R4A.2@97.114,107.688 R4B.2@77.175,107.823 R7A.2@105.689,96.324 R7B.2@85.75,96.459 R8A.2@92.735,97.467 R8B.2@72.796,97.602 | length 67.8
  Top Layer w0.3: IC1.20@87.636,71.079 89.02,71.079
  Top Layer w0.45: 89.052,71.111 90.535,71.111
  Top Layer w0.508: R4B.2@77.175,107.823 R1B.2@79.339,107.823 79.339,99.634 78.003,98.298 ; v1(85.75,94.742) R7B.2@85.75,96.459 ; 90.552,71.094 92.415,71.094 92.837,71.516 CM4.2@94.082,71.516 ; R4A.2@97.114,107.688 R1A.2@99.278,107.688 99.212,107.622 99.212,100.846 97.815,99.449 97.815,98.171
  Bottom Layer w0.508: J4.1@75.082,115.062 76.032,114.112 Cs4.1@77.495,114.112 ; J3.1@86.512,115.062 87.462,114.112 Cs3.1@88.951,114.112 ; v1(94.386,69.977) 94.386,67.818 97.815,64.389 97.815,59.182 96.926,58.293 95.04,58.293 94.742,57.995 J9.2@94.742,52.045 ; J2.1@97.942,115.062 98.892,114.112 Cs2.1@100.355,114.112 ; J1.1@109.372,115.062 109.941,114.493 Cs1.1@109.941,110.49
  other v1: 79.146,90.805 80.797,91.313 103.526,92.587 104.796,93.984 79.4,94.234 99.462,94.365 90.957,94.869 101.113,95.508 78.638,95.631 90.957,97.155 97.561,97.409
3V3A: C5A.2@44.504,120.316 C6A.1 J1A.1 R7A.2@37.905,108.632 U1A.8 | length 18.7
  Top Layer w0.508: R7A.2@37.905,108.632 37.905,107.191 38.964,106.133 48.489,106.133 52.934,110.578
3V3B: C5B.2@45.139,94.695 C6B.1 J1B.1 R7B.2@38.54,83.011 U1B.8 | length 18.7
  Top Layer w0.508: R7B.2@38.54,83.011 38.54,81.571 39.599,80.513 49.124,80.513 53.569,84.958
3V3C: C5C.2 C6C.1 J1C.1 R7C.2 U1C.8 | length 18.7
  Top Layer w0.508: 37.49,67.603 41.935,72.048 51.46,72.048 52.519,70.99 R7C.2@52.519,69.549
3V3D: C5D.2 C6D.1 J1D.1 R7D.2 U1D.8 | length 18.7
  Top Layer w0.508: 37.338,41.783 41.783,46.228 51.308,46.228 52.366,45.17 R7D.2@52.366,43.729
5V: *.1 C1.1 C3.1 C4.1 CR7.3 J5.1 J8.1 J_5V.1
5V_e: J6.1 J7.1 Re3.2 | length 31.9
  Top Layer w0.508: Re3.2@88.58,29.972 88.643,29.909 95.567,29.909 J7.1@95.631,29.845 96.631,29.845 98.536,27.94 113.665,27.94 115.57,29.845 J6.1@118.872,29.845
6V: CM1.1 CM2.1 IC1.13 IC1.14 IC1.24 J_6V.1
AIN1: *.27 IC1.21 | length 17
  Top Layer w0.203: IC1.21@87.636,71.729 89.468,71.729 89.993,72.254 v1(90.272,72.254)
  Bottom Layer w0.203: *.27@88.544,60.198 88.544,60.386 91.364,63.205 91.364,71.984 91.093,72.254 v1(90.272,72.254)
AIN2: *.25 IC1.22 | length 18.4
  Top Layer w0.203: IC1.22@87.636,72.379 89.041,72.379 89.281,72.619 89.281,73 89.56,73.279 v1(91.592,73.279)
  Bottom Layer w0.203: v1(91.592,73.279) 91.655,73.217 91.655,72.339 91.858,72.136 91.858,66.765 94.132,64.491 *.25@94.132,60.452
BIN1: *.7 IC1.17 | length 29
  Top Layer w0.203: IC1.17@87.636,69.129 89.249,69.129 89.401,68.978 98.391,68.978 101.625,72.212 *.7@101.625,85.852
BIN2: *.6 IC1.16 | length 31.8
  Top Layer w0.203: IC1.16@87.636,68.479 100.635,68.479 104.165,72.009 *.6@104.165,85.852
Dled: *.9 J5.2 | length 42.2
  Top Layer w0.2: *.9@96.164,85.41 *.9@96.164,85.598
  Bottom Layer w0.203: *.9@96.545,85.852 96.545,77.216 99.974,73.787 105.054,73.787 107.213,71.628 107.213,65.278 107.975,64.516 107.975,53.213 108.335,52.853 J5.2@109.454,52.853
Dled_e: J6.2 Re1.2 Re2.1 | length 13.2
  Top Layer w0.508: Re1.2@111.059,34.925 Re2.1@111.059,30.353 113.411,30.353 115.443,32.385 J6.2@118.872,32.385
Dservo: *.8 J8.2 | length 51.2
  Bottom Layer w0.203: *.8@99.085,85.852 99.085,78.486 99.974,77.597 111.531,77.597 115.087,74.041 115.087,62.103 115.595,61.595 115.595,53.34 116.082,52.853 J8.2@120.452,52.853
Dspkr: *.10